# EAGLE board panel (EAGLE 9.6.1)
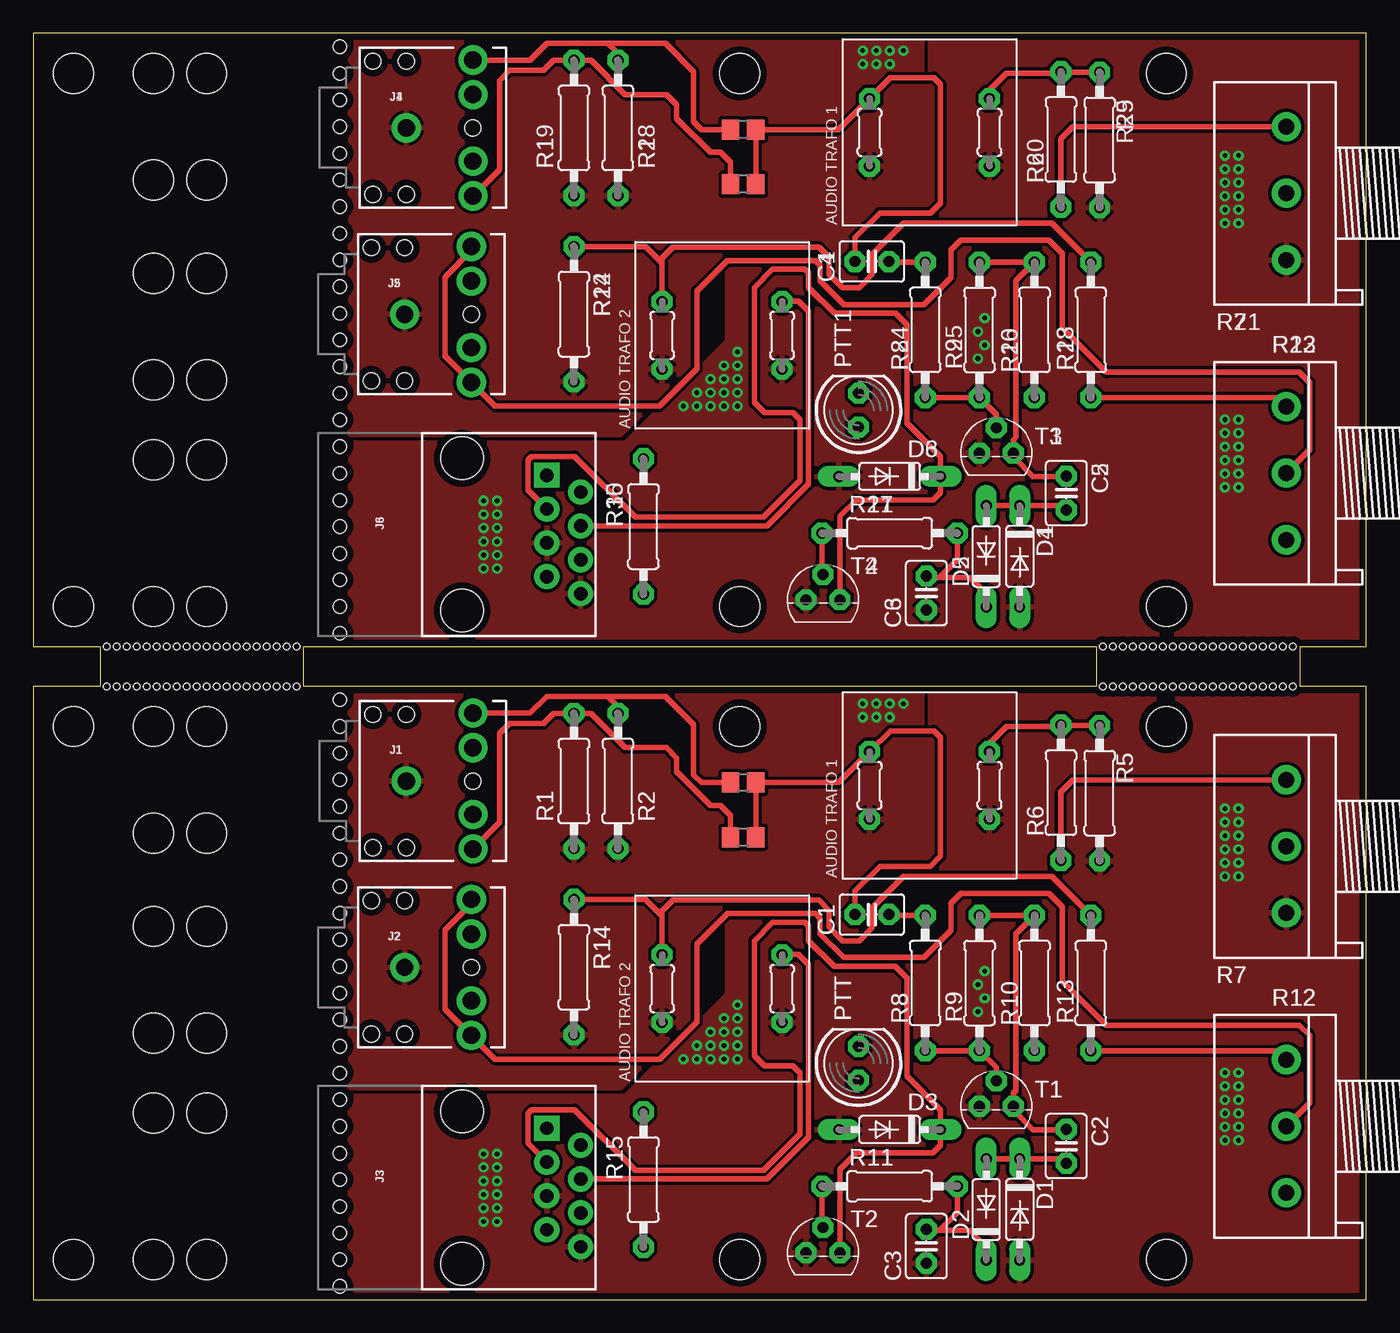
[diagram p0: board, top side]
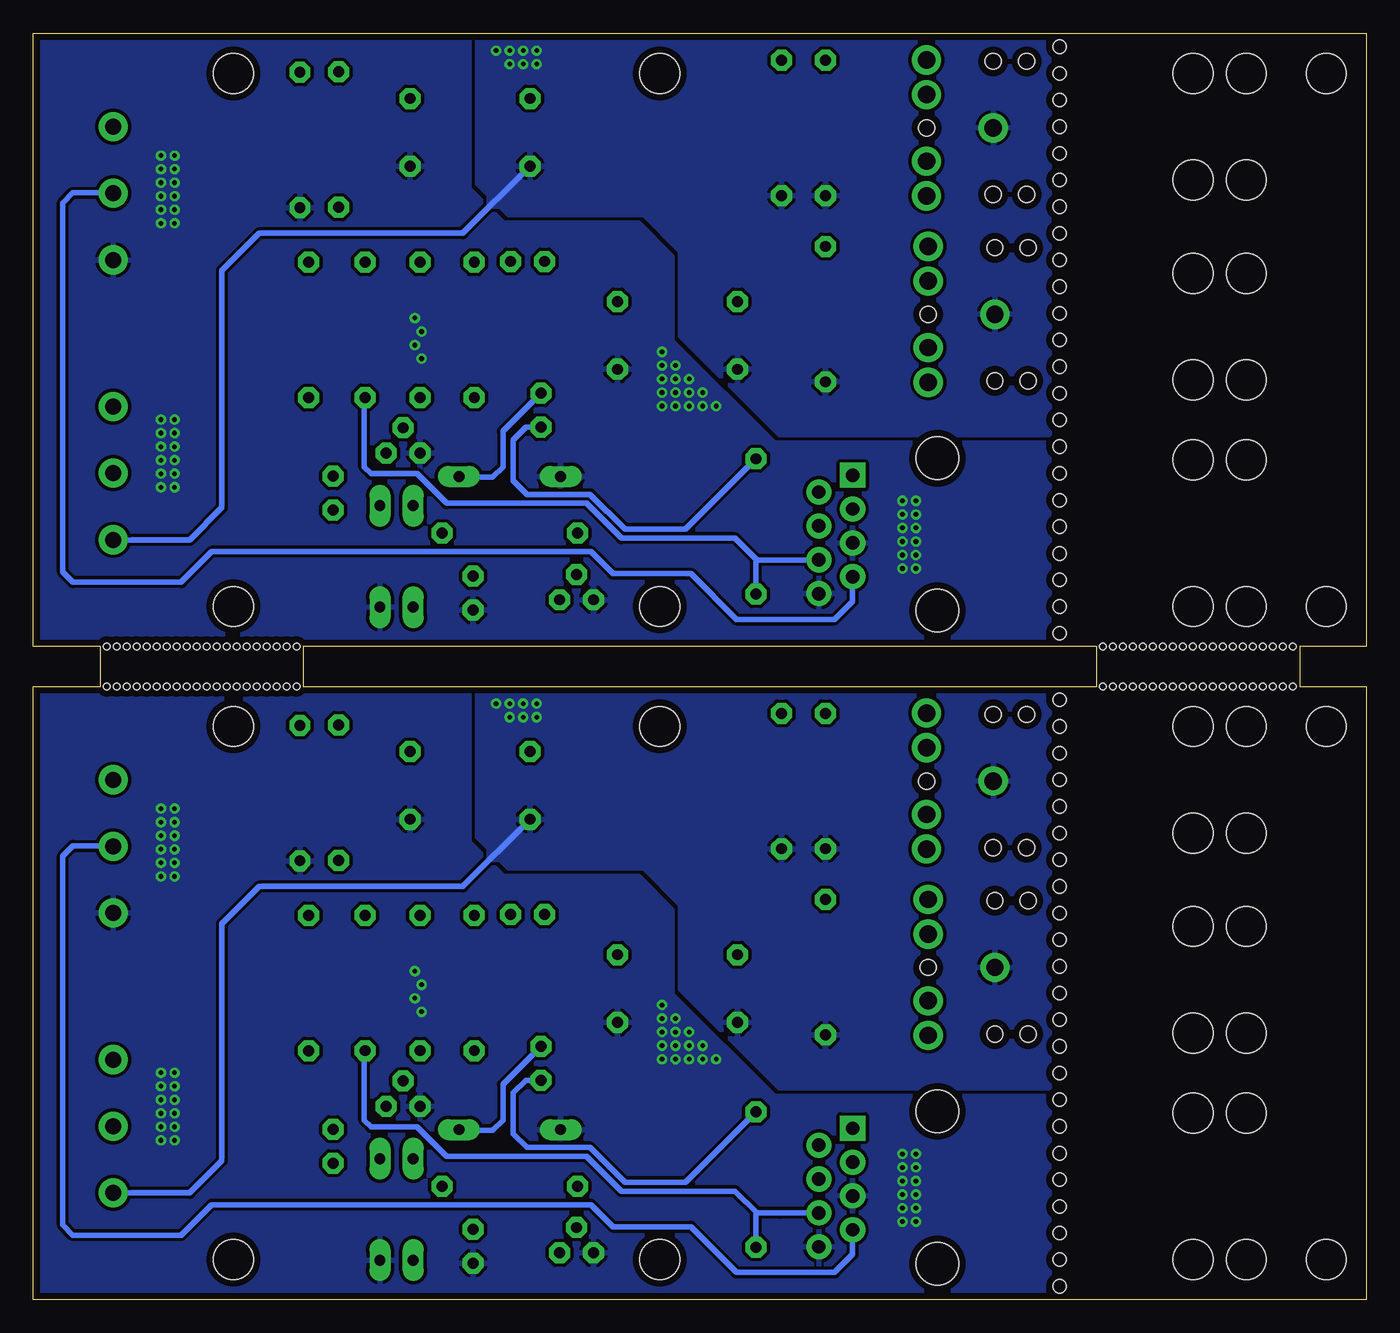
[diagram p1: board, bottom side, seen from below]

Size 100 x 95 mm. Coordinates in mm from the lower left corner, seen from the top.
Outline: 0,0 100,0 100,46 95,46 95,49 100,49 100,95 0,95 0,49 5,49 5,46 0,46 0,0
Outline: 79.75,46 20.25,46 20.25,49 79.75,49 79.75,46
Copper layers (1*16): Top 0.035mm / dielectric 1.5mm / Bottom 0.035mm
Design rules "default *": minimum track width 6mil, minimum drill 0.35mm, track to track 10mil, track to pad 10mil, pad to pad 10mil, via to via 10mil, smd to smd 10mil, copper to edge 20mil, drill to drill 6mil, minimum pad ring 15mil, minimum via ring 8mil, stop-mask expansion 4mil, vias tented up to drill 30mil, thermal gap 10mil
Holes 3 mm at 53,43 53,3 85,43 85,3 3,43 3,3 9,43 13,43 9,35 13,35 9,28 13,28 9,20 13,20 9,14 13,14 9,3 13,3 53,92 53,52 85,92 85,52 3,92 3,52 9,92 13,92 9,84 13,84 9,77 13,77 9,69 13,69 9,63 13,63 9,52 13,52
Holes 1 mm at 23,13 23,9 23,1 23,3 23,5 23,10.97 23,6.97 23,15 23,17 23,19 23,21 23,23 23,25 23,27 23,29 23,31 23,33 23,35 23,37 23,39 23,41 23,43 23,45 23,62 23,58 23,50 23,52 23,54 23,59.97 23,55.97 23,64 23,66 23,68 23,70 23,72 23,74 23,76 23,78 23,80 23,82 23,84 23,86 23,88 23,90 23,92 23,94
Holes 0.5 mm at 5.5,49 6.25,49 7,49 7.75,49 8.5,49 9.25,49 10,49 10.75,49 11.5,49 12.25,49 13,49 13.75,49 14.5,49 15.25,49 16,49 16.75,49 17.5,49 18.25,49 19,49 19.75,49 5.5,46 6.25,46 7,46 7.75,46 8.5,46 9.25,46 10,46 10.75,46 11.5,46 12.25,46 13,46 13.75,46 14.5,46 15.25,46 16,46 16.75,46 17.5,46 18.25,46 19,46 19.75,46 80.25,49 81,49 81.75,49 82.5,49 83.25,49 84,49 84.75,49 85.5,49 86.25,49 87,49 87.75,49 88.5,49 89.25,49 90,49 90.75,49 91.5,49 92.25,49 93,49 93.75,49 94.5,49 80.25,46 81,46 81.75,46 82.5,46 83.25,46 84,46 84.75,46 85.5,46 86.25,46 87,46 87.75,46 88.5,46 89.25,46 90,46 90.75,46 91.5,46 92.25,46 93,46 93.75,46 94.5,46

## Footprints (pad centres in the part's own frame; a part is rotated, then mirrored left to right if it is on the bottom)
C025-030X050 = drill 0.813 octagon: 1 -1.27,0; 2 1.27,0
DO35-7 = drill 0.813 long: A 3.81,0; C -3.81,0
AUDIO-JACK-KIT = drill 1.3 pad 2.184: RING 5,5.1; RSH 5,2.5; SLEEVE 0,0; TIP 5,-5.1; TSH 5,-2.5 | hole 1.2: 0,5; -2.5,5; -2.5,-5; 0,-5; 5,0
RJ45-8 = drill 1 pad 1.88 square: 1 -4.445,6.35 | drill 1 pad 1.88: 2 -3.175,8.89; 3 -1.905,6.35; 4 -0.635,8.89; 5 0.635,6.35; 6 1.905,8.89; 7 3.175,6.35; 8 4.445,8.89 | hole 3.2: -5.715,0; 5.715,0
0204/5 = drill 0.813 octagon: 1 -2.54,0; 2 2.54,0
LED5MM = drill 0.813 octagon: A -1.27,0; K 1.27,0
0207/10 = drill 0.813 octagon: 1 -5.08,0; 2 5.08,0
R0805 = smd 1.3 x 1.5: 1 -0.95,0; 2 0.95,0
3RP/1610N = drill 1.2 pad 2.184: 1 -5,0; 2 0,0; 3 5,0
TO92 = drill 0.813 octagon: 1 1.27,0; 2 0,1.905; 3 -1.27,0

## Placement (x,y rotation side)
C1  1uF  [C025-030X050]  62.91,28.88 0 top
C2  1uF  [C025-030X050]  77.5,11.5 270 top
C3  1uF  [C025-030X050]  67,4 270 top
C4  1uF  [C025-030X050]  62.91,77.88 0 top
C5  1uF  [C025-030X050]  77.5,60.5 270 top
C6  1uF  [C025-030X050]  67,53 270 top
D1  1N4148  [DO35-7]  74,6.75 270 top
D2  1N4148  [DO35-7]  71.5,6.75 90 top
D3  1N4148  [DO35-7]  64.25,12.75 180 top
D4  1N4148  [DO35-7]  74,55.75 270 top
D5  1N4148  [DO35-7]  71.5,55.75 90 top
D6  1N4148  [DO35-7]  64.25,61.75 180 top
J1  AUDIO_JACK_3.5MM_KIT  [AUDIO-JACK-KIT]  27.98,38.9 0 top
J2  AUDIO_JACK_3.5MM_KIT  [AUDIO-JACK-KIT]  27.86,24.91 0 top
J3  RJ45  [RJ45-8]  32.18,8.4 270 top
J4  AUDIO_JACK_3.5MM_KIT  [AUDIO-JACK-KIT]  27.98,87.9 0 top
J5  AUDIO_JACK_3.5MM_KIT  [AUDIO-JACK-KIT]  27.86,73.91 0 top
J6  RJ45  [RJ45-8]  32.18,57.4 270 top
L1  [0204/5]  62.74,38.57 270 top
L2  [0204/5]  71.74,38.57 270 top
L3  [0204/5]  47.18,23.33 270 top
L4  [0204/5]  56.18,23.33 270 top
L5  [0204/5]  62.74,87.57 270 top
L6  [0204/5]  71.74,87.57 270 top
L7  [0204/5]  47.18,72.33 270 top
L8  [0204/5]  56.18,72.33 270 top
PTT  [LED5MM]  61.91,17.73 90 top
PTT1  [LED5MM]  61.91,66.73 90 top
R1  68R  [0207/10]  40.56,38.9 90 top
R2  68R  [0207/10]  43.86,38.9 90 top
R3  0R  [R0805]  53.26,38.78 180 top
R4  0R  [R0805]  53.26,34.68 180 top
R5  680R  [0207/10]  80,38 270 top
R6  4K7  [0207/10]  77.1,38.03 90 top
R7  10K  [3RP/1610N]  94,34 90 top
R8  47K  [0207/10]  66.92,23.75 90 top
R9  330K  [0207/10]  70.99,23.75 270 top
R10  4K7  [0207/10]  75.11,23.75 90 top
R11  3K3  [0207/10]  64.25,8.5 0 top
R12  10K  [3RP/1610N]  94,13 90 top
R13  4k7  [0207/10]  79.34,23.75 90 top
R14  680R  [0207/10]  40.56,24.93 270 top
R15  220R  [0207/10]  45.78,9 270 top
R16  0R  [R0805]  53.26,87.78 180 top
R17  0R  [R0805]  53.26,83.68 180 top
R18  68R  [0207/10]  43.86,87.9 90 top
R19  68R  [0207/10]  40.56,87.9 90 top
R20  4K7  [0207/10]  77.1,87.03 90 top
R21  10K  [3RP/1610N]  94,83 90 top
R22  680R  [0207/10]  40.56,73.93 270 top
R23  10K  [3RP/1610N]  94,62 90 top
R24  47K  [0207/10]  66.92,72.75 90 top
R25  330K  [0207/10]  70.99,72.75 270 top
R26  4K7  [0207/10]  75.11,72.75 90 top
R27  3K3  [0207/10]  64.25,57.5 0 top
R28  4k7  [0207/10]  79.34,72.75 90 top
R29  680R  [0207/10]  80,87 270 top
R30  220R  [0207/10]  45.78,58 270 top
T1  2N3904  [TO92]  72.25,14.5 0 top
T2  2N3904  [TO92]  59.25,3.5 0 top
T3  2N3904  [TO92]  72.25,63.5 0 top
T4  2N3904  [TO92]  59.25,52.5 0 top

## Library data of the parts
C1-C6 = rcl; SPICEPREFIX: C
D1-D6 = diode
J1 J2 J4 J5 = SparkFun-Connectors; PROD_ID: CONN-08774; SF_ID: PRT-08032
J3 J6 = SparkFun-Connectors; PROD_ID: CONN-08506; SF_ID: PRT-00643
L1-L8 = rcl; SPICEPREFIX: L
PTT PTT1 = led
R1-R6 R8-R11 R13-R20 R22 R24-R30 = rcl; SPICEPREFIX: R
R7 R12 R21 R23 = pot
T1-T4 = transistor

## Nets
8V: J3.6 R10.1 R15.2
8V1: J6.6 R26.1 R30.2
GND: J1.SLEEVE J2.SLEEVE L1.2 L3.2 R1.1 R2.1 R12.1 R14.2
GND1: J4.SLEEVE J5.SLEEVE L5.2 L7.2 R18.1 R19.1 R22.2 R23.1
GND_1: C6.2 D4.A D6.A J6.5 J6.8 L6.2 L8.2 R21.1 R29.2 T3.3 T4.3
GND_2: C3.2 D1.A D3.A J3.5 J3.8 L2.2 L4.2 R5.2 R7.1 T1.3 T2.3
N$1: J1.RING R2.2 R3.2
N$2: J1.TIP R1.2 R4.2
N$3: R12.3 R13.1
N$4: J2.RING J2.TIP R12.2
N$5: R6.1 R7.3
N$6: PTT.A R15.1
N$7: L3.1 R13.2 R14.1
N$8: L2.1 R5.1 R6.2
N$9: C1.2 R8.2
N$10: C2.1 R9.1 R10.2 T1.1
N$11: R8.1 R9.2 T1.2
N$12: C2.2 D1.C D2.A
N$13: C3.1 D2.C R11.2
N$14: R11.1 T2.2
N$15: C1.1 L1.1 R3.1 R4.1
N$16: L6.1 R20.2 R29.1
N$17: J4.RING R16.2 R18.2
N$18: J4.TIP R17.2 R19.2
N$19: J5.RING J5.TIP R23.2
N$20: L7.1 R22.1 R28.2
N$21: C4.2 R24.2
N$22: R24.1 R25.2 T3.2
N$23: C5.1 R25.1 R26.2 T3.1
N$24: C5.2 D4.C D5.A
N$25: R27.1 T4.2
N$26: C6.1 D5.C R27.2
N$27: C4.1 L5.1 R16.1 R17.1
N$28: R20.1 R21.3
N$29: R23.3 R28.1
N$30: PTT1.A R30.1
PTT: D3.C J3.3 PTT.K T2.1
PTT1: D6.C J6.3 PTT1.K T4.1
RIG_MIC_IN: J3.7 R7.2
RIG_MIC_IN1: J6.7 R21.2
RIG_SPKR_OUT: J3.4 L4.1
RIG_SPKR_OUT1: J6.4 L8.1

## Tracks (layer width: path | path; a pad name or v marks a point on that pad's centre or on a via)
8V
  Bottom 0.406: R10.1 75.17,18.61 75.17,13.46 74.66,12.95 71.2,12.95 69,10.75 58.5,10.75 55.88,8.13 47.35,8.13 45.72,6.5 | J3.6 44,6.5 45.72,6.5 | 45.72,6.5 45.78,6.5 R15.2
8V1
  Bottom 0.406: R26.1 75.17,67.61 75.17,62.46 74.66,61.95 71.2,61.95 69,59.75 58.5,59.75 55.88,57.13 47.35,57.13 45.72,55.5 | J6.6 44,55.5 45.72,55.5 | 45.72,55.5 45.78,55.5 R30.2
GND  (via drill 0.35)
  Bottom 0.406: L1.2 67.78,30.99 83.06,30.99 85.85,28.19 85.85,10.41 88.27,8 R12.1
  other vias: 62.23,44.7 63.25,44.7 64.26,44.7 65.28,44.7 64.26,43.69 63.25,43.69 62.23,43.69
  pour Top (isolate 0.051, rank 2): 21.59,47.78 21.59,-5.08 106.68,-5.08 106.68,47.78
  pour Bottom (isolate 0.051, rank 2): 19.82,46.78 19.82,-5.08 105.41,-5.08 105.41,46.78
GND1  (via drill 0.35)
  Bottom 0.406: L5.2 67.78,79.99 83.06,79.99 85.85,77.19 85.85,59.41 88.27,57 R23.1
  other vias: 62.23,93.7 63.25,93.7 64.26,93.7 65.28,93.7 64.26,92.69 63.25,92.69 62.23,92.69
  pour Top (isolate 0.051, rank 2): 21.59,98.53 21.59,48.67 106.68,48.67 106.68,98.53
  pour Bottom (isolate 0.051, rank 2): 21.07,98.53 21.07,48.67 105.41,48.67 105.41,98.53
GND_1  (via drill 0.35)
  other vias: 89.41,85.83 90.42,85.83 89.41,84.81 90.42,84.81 89.41,83.8 90.42,83.8 89.41,82.78 90.42,82.78 89.41,81.77 90.42,81.77 89.41,80.75 90.42,80.75 89.41,66.02 90.42,66.02 89.41,65 90.42,65 89.41,63.99 90.42,63.99 89.41,62.97 90.42,62.97 89.41,61.95 90.42,61.95 89.41,60.94 90.42,60.94 33.78,59.92 34.8,59.92 33.78,58.91 34.8,58.91 33.78,57.89 34.8,57.89 33.78,56.87 34.8,56.87 33.78,55.86 34.8,55.86 33.78,54.84 34.8,54.84 52.83,71.1 51.82,70.08 52.83,70.08 50.8,69.07 51.82,69.07 52.83,69.07 52.83,68.05 51.82,68.05 50.8,68.05 49.78,68.05 48.77,67.03 49.78,67.03 50.8,67.03 51.82,67.03 52.83,67.03 71.37,73.64 70.87,72.62 71.37,71.61 70.87,70.59
  pour Top (isolate 0.051): 21.59,48.73 101.6,48.73 101.6,95.99 67.31,95.99 67.31,83.29 64.77,80.75 54.61,80.75 52.07,78.21 52.07,71.86 44.45,64.24 21.59,64.24
  pour Bottom (isolate 0.051): 21.59,48.73 100.33,48.73 100.33,95.99 67.31,95.99 67.31,83.29 64.77,80.75 54.61,80.75 52.07,78.21 52.07,71.86 44.45,64.24 21.59,64.24
GND_2  (via drill 0.35)
  other vias: 89.41,36.83 90.42,36.83 89.41,35.81 90.42,35.81 89.41,34.8 90.42,34.8 89.41,33.78 90.42,33.78 89.41,32.77 90.42,32.77 89.41,31.75 90.42,31.75 89.41,17.02 90.42,17.02 89.41,16 90.42,16 89.41,14.99 90.42,14.99 89.41,13.97 90.42,13.97 89.41,12.95 90.42,12.95 89.41,11.94 90.42,11.94 33.78,10.92 34.8,10.92 33.78,9.91 34.8,9.91 33.78,8.89 34.8,8.89 33.78,7.87 34.8,7.87 33.78,6.86 34.8,6.86 33.78,5.84 34.8,5.84 52.83,22.1 51.82,21.08 52.83,21.08 50.8,20.07 51.82,20.07 52.83,20.07 52.83,19.05 51.82,19.05 50.8,19.05 49.78,19.05 48.77,18.03 49.78,18.03 50.8,18.03 51.82,18.03 52.83,18.03 71.37,24.64 70.87,23.62 71.37,22.61 70.87,21.59
  pour Top (isolate 0.051): 21.59,-1.27 101.6,-1.27 101.6,46.99 67.31,46.99 67.31,34.29 64.77,31.75 62.23,31.75 54.61,31.75 52.07,29.21 52.07,22.86 48.26,19.05 46.99,17.78 44.45,15.24 21.59,15.24
  pour Bottom (isolate 0.051): 21.59,-1.27 100.33,-1.27 100.33,46.99 67.31,46.99 67.31,34.29 64.77,31.75 54.61,31.75 52.07,29.21 52.07,22.86 44.45,15.24 21.59,15.24
N$1
  Top 0.406: J1.RING 37.28,44 38.53,45.25 43.1,45.25 | 43.1,45.25 43.86,44.49 R2.2 | 43.1,45.25 47.42,45.25 49.53,43.14 49.53,39.37 50.12,38.78 R3.2
N$2
  Top 0.406: J1.TIP 34.97,35.78 34.97,42.46 35.73,43.22 38.27,43.22 39.03,43.98 R1.2 41.83,43.98 44.41,41.4 47.5,41.4 48.26,40.64 48.26,39.61 50.79,37.08 51.57,37.08 52.32,36.32 52.31,36.31 R4.2
N$3
  Top 0.406: R13.1 93.33,18.67 R12.3
N$4
  Top 0.406: J2.RING 32.86,29.68 30.91,27.72 30.91,21.77 J2.TIP 34.64,18.03 46.99,18.03 49.78,20.83 49.78,26.67 52.07,28.96 58.67,28.96 59.03,28.6 59.03,27.43 60.81,25.65 66.8,25.65 68.83,27.69 68.83,29.72 69.6,30.48 76.2,30.48 77.22,29.46 77.22,23.88 80.52,20.57 95,20.57 95.76,19.81 95.76,14.76 R12.2
N$5
  Top 0.406: R6.1 77.1,38.1 78,39 R7.3
N$6
  Bottom 0.406: PTT.A 63.05,16.46 64.01,15.49 64.01,12.45 62.97,11.41 58.23,11.41 55.6,8.79 51.07,8.79 R15.1
N$7
  Top 0.406: R14.1 45.94,30.01 47.18,28.77 | 47.18,28.77 L3.1 | R13.2 76.41,31.75 65.28,31.75 65.28,31.74 62.94,29.4 62.94,27.89 61.98,26.92 60.71,26.92 59.69,27.94 59.69,29.21 58.93,29.97 48.01,29.97 47.18,29.14 47.18,28.77
N$8
  Top 0.406: R6.2 77.07,43.08 | R5.1 77.07,43.08 | 77.07,43.08 76.99,43 73,43 72.02,42.02 71.74,41.74 L2.1
N$9
  Top 0.406: C1.2 64.24,28.83 R8.2
N$10
  Top 0.406: C2.1 77.48,12.75 75,12.75 73.52,14.23 T1.1 73.52,15.5 73.71,15.69 73.71,27.44 R10.2 R9.1
N$11
  Top 0.406: R8.1 R9.2 72.25,17.41 T1.2
N$12
  Top 0.406: C2.2 77.17,10.56 D1.C D2.A
N$13
  Top 0.406: R11.2 69.33,6.52 67.99,5.18 | 67.99,5.18 67.09,5.18 C3.1 | D2.C 71.04,3.41 71.04,4.42 70.28,5.18 67.99,5.18
N$14
  Top 0.406: T2.2 59.17,5.49 R11.1
N$15
  Top 0.406: R4.1 R3.1 60.4,38.78 L1.1 64.3,42.67 67.56,42.67 68.07,42.16 68.07,33.27 67.31,32.51 63.5,32.51 61.64,30.65 C1.1
N$16
  Top 0.406: R20.2 77.07,92.08 | R29.1 77.07,92.08 | 77.07,92.08 76.99,92 73,92 72.02,91.02 71.74,90.74 L6.1
N$17
  Top 0.406: J4.RING 37.28,93 38.53,94.25 43.1,94.25 | 43.1,94.25 43.86,93.49 R18.2 | 43.1,94.25 47.42,94.25 49.53,92.14 49.53,88.37 50.12,87.78 R16.2
N$18
  Top 0.406: J4.TIP 34.97,84.78 34.97,91.46 35.73,92.22 38.27,92.22 39.03,92.98 R19.2 41.83,92.98 44.41,90.4 47.5,90.4 48.26,89.64 48.26,88.61 50.79,86.08 51.57,86.08 52.32,85.32 52.31,85.31 R17.2
N$19
  Top 0.406: J5.RING 32.86,78.68 30.91,76.72 30.91,70.77 J5.TIP 34.64,67.03 46.99,67.03 49.78,69.83 49.78,75.67 52.07,77.96 58.67,77.96 59.03,77.6 59.03,76.43 60.81,74.65 66.8,74.65 68.83,76.69 68.83,78.72 69.6,79.48 76.2,79.48 77.22,78.46 77.22,72.88 80.52,69.57 95,69.57 95.76,68.81 95.76,63.76 R23.2
N$20
  Top 0.406: R22.1 45.94,79.01 47.18,77.77 | 47.18,77.77 L7.1 | R28.2 76.41,80.75 65.28,80.75 65.28,80.74 62.94,78.4 62.94,76.89 61.98,75.92 60.71,75.92 59.69,76.94 59.69,78.21 58.93,78.97 48.01,78.97 47.18,78.14 47.18,77.77
N$21
  Top 0.406: C4.2 64.24,77.83 R24.2
N$22
  Top 0.406: R24.1 R25.2 72.25,66.41 T3.2
N$23
  Top 0.406: C5.1 77.48,61.75 75,61.75 73.52,63.23 T3.1 73.52,64.5 73.71,64.69 73.71,76.44 R26.2 R25.1
N$24
  Top 0.406: C5.2 77.17,59.56 D4.C D5.A
N$25
  Top 0.406: T4.2 59.17,54.48 R27.1
N$26
  Top 0.406: R27.2 69.33,55.52 67.99,54.18 | 67.99,54.18 67.09,54.18 C6.1 | D5.C 71.04,52.41 71.04,53.42 70.28,54.18 67.99,54.18
N$27
  Top 0.406: R17.1 R16.1 60.4,87.78 L5.1 64.3,91.67 67.56,91.67 68.07,91.16 68.07,82.27 67.31,81.51 63.5,81.51 61.64,79.65 C4.1
N$28
  Top 0.406: R20.1 77.1,87.1 78,88 R21.3
N$29
  Top 0.406: R28.1 93.33,67.67 R23.3
N$30
  Bottom 0.406: PTT1.A 63.05,65.46 64.01,64.49 64.01,61.45 62.97,60.41 58.23,60.41 55.6,57.79 51.07,57.79 R30.1
PTT
  Top 0.406: T2.1 60.52,9.77 61.75,11 67.5,11 68.06,11.56 D3.C 68.06,14.24 65.53,16.76 65.53,24.13 64.67,24.99 60.1,24.99 58.17,26.92 58.17,28.04 57.91,28.3 55.47,28.3 54.1,26.92 54.1,18.29 54.86,17.53 57,17.53 57.51,17.02 57.51,12.44 54.77,9.7 45.16,9.7 40.62,14.25 37.4,14.25 37.13,13.98 37.13,11.72 38.53,10.32 J3.3
  Bottom 0.406: PTT.K 64.77,16.14 64.77,13.46 65.53,12.7 68.01,12.7 D3.C
PTT1
  Top 0.406: T4.1 60.52,58.77 61.75,60 67.5,60 68.06,60.56 D6.C 68.06,63.24 65.53,65.76 65.53,73.13 64.67,73.99 60.1,73.99 58.17,75.92 58.17,77.04 57.91,77.3 55.47,77.3 54.1,75.92 54.1,67.29 54.86,66.53 57,66.53 57.51,66.02 57.51,61.44 54.77,58.7 45.16,58.7 40.62,63.25 37.4,63.25 37.13,62.98 37.13,60.72 38.53,59.32 J6.3
  Bottom 0.406: PTT1.K 64.77,65.14 64.77,62.46 65.53,61.7 68.01,61.7 D6.C
RIG_MIC_IN
  Bottom 0.406: J3.7 38.53,3.38 39.88,2.03 47.24,2.03 50.67,5.46 56.52,5.46 58.17,7.11 86.61,7.11 88.9,4.83 97.03,4.83 97.79,5.59 97.79,33.27 97.03,34.04 94.04,34.04 R7.2
RIG_MIC_IN1
  Bottom 0.406: J6.7 38.53,52.38 39.88,51.03 47.24,51.03 50.67,54.46 56.52,54.46 58.17,56.11 86.61,56.11 88.9,53.83 97.03,53.83 97.79,54.59 97.79,82.27 97.03,83.04 94.04,83.04 R21.2
RIG_SPKR_OUT
  Top 0.406: J3.4 55.04,9.04 58.17,12.17 58.17,25.15 57.4,25.91 56.21,25.91 L4.1
RIG_SPKR_OUT1
  Top 0.406: J6.4 55.04,58.04 58.17,61.17 58.17,74.15 57.4,74.91 56.21,74.91 L8.1

## Text on the board
tPlace: AUDIO TRAFO 1 | AUDIO TRAFO 2 | AUDIO TRAFO 1 | AUDIO TRAFO 2
tValues: AUDIO IN RING | AUDIO IN TIP | AUDIO IN RING | AUDIO IN TIP
bValues: https://github.com/ivica3730k/AFSK-Ham-Radio-Interface | https://ivica-matic.com | https://github.com/ivica3730k/AFSK-Ham-Radio-Interface | https://ivica-matic.com
Document: PC SPKR OUT | RIG INPUT LEVEL | PC MIC INPUT | RIG IO | 3 -> PTT / 4 -> AF / 5 -> GND / 6 -> VCC / 7 -> MOD IN / 8 -> GND | RIG OUTPUT LEVEL | AFSK Modes Interface / 11/2020 - 9A3ICE | PC SPKR OUT | RIG INPUT LEVEL | PC MIC INPUT | RIG IO | 3 -> PTT / 4 -> AF / 5 -> GND / 6 -> VCC / 7 -> MOD IN / 8 -> GND | RIG OUTPUT LEVEL | AFSK Modes Interface / 11/2020 - 9A3ICE
_tNames: J1 | R5 | R1 | R2 | R6 | R14 | J2 | C1 | R7 | R12 | PTT | R8 | R9 | R10 | R13 | D3 | T1 | C2 | R15 | J3 | R11 | D1 | T2 | C3 | D2 | J1 | R5 | R1 | R2 | R6 | R14 | J2 | C1 | R7 | R12 | PTT | R8 | R9 | R10 | R13 | D3 | T1 | C2 | R15 | J3 | R11 | D1 | T2 | C3 | D2